# Altium PCB TicketMonitorSystem.PcbDoc
Units mil, origin at the board's own origin, x right, y up, seen from the top; angles counter-clockwise.
Board outline 6000 x 4000 mil, 2 copper layers (Top Layer, Bottom Layer); 47 components, 52 nets, 205 pads, 36 vias.
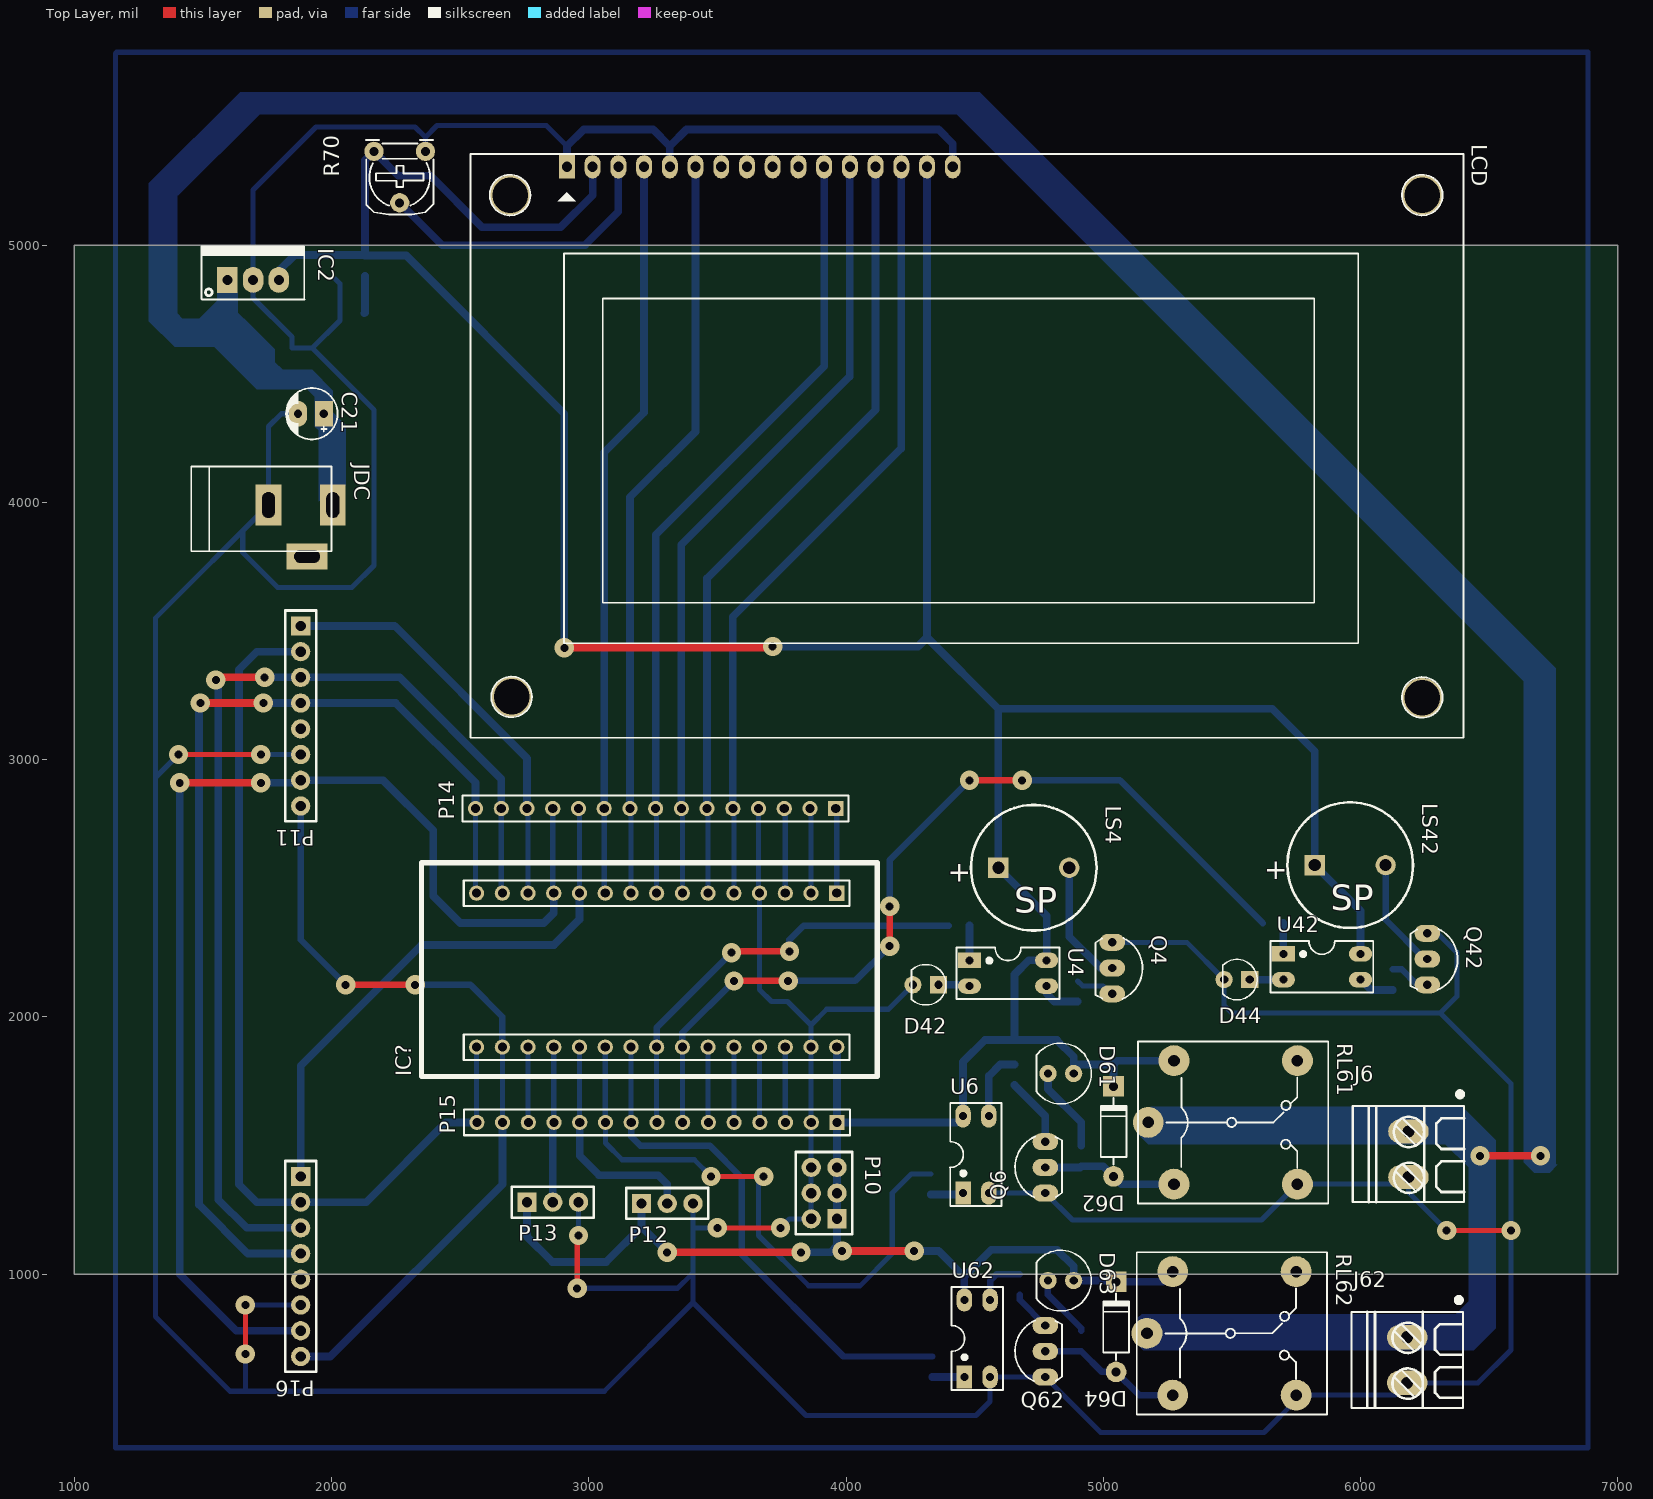
[diagram p0: Top Layer view]
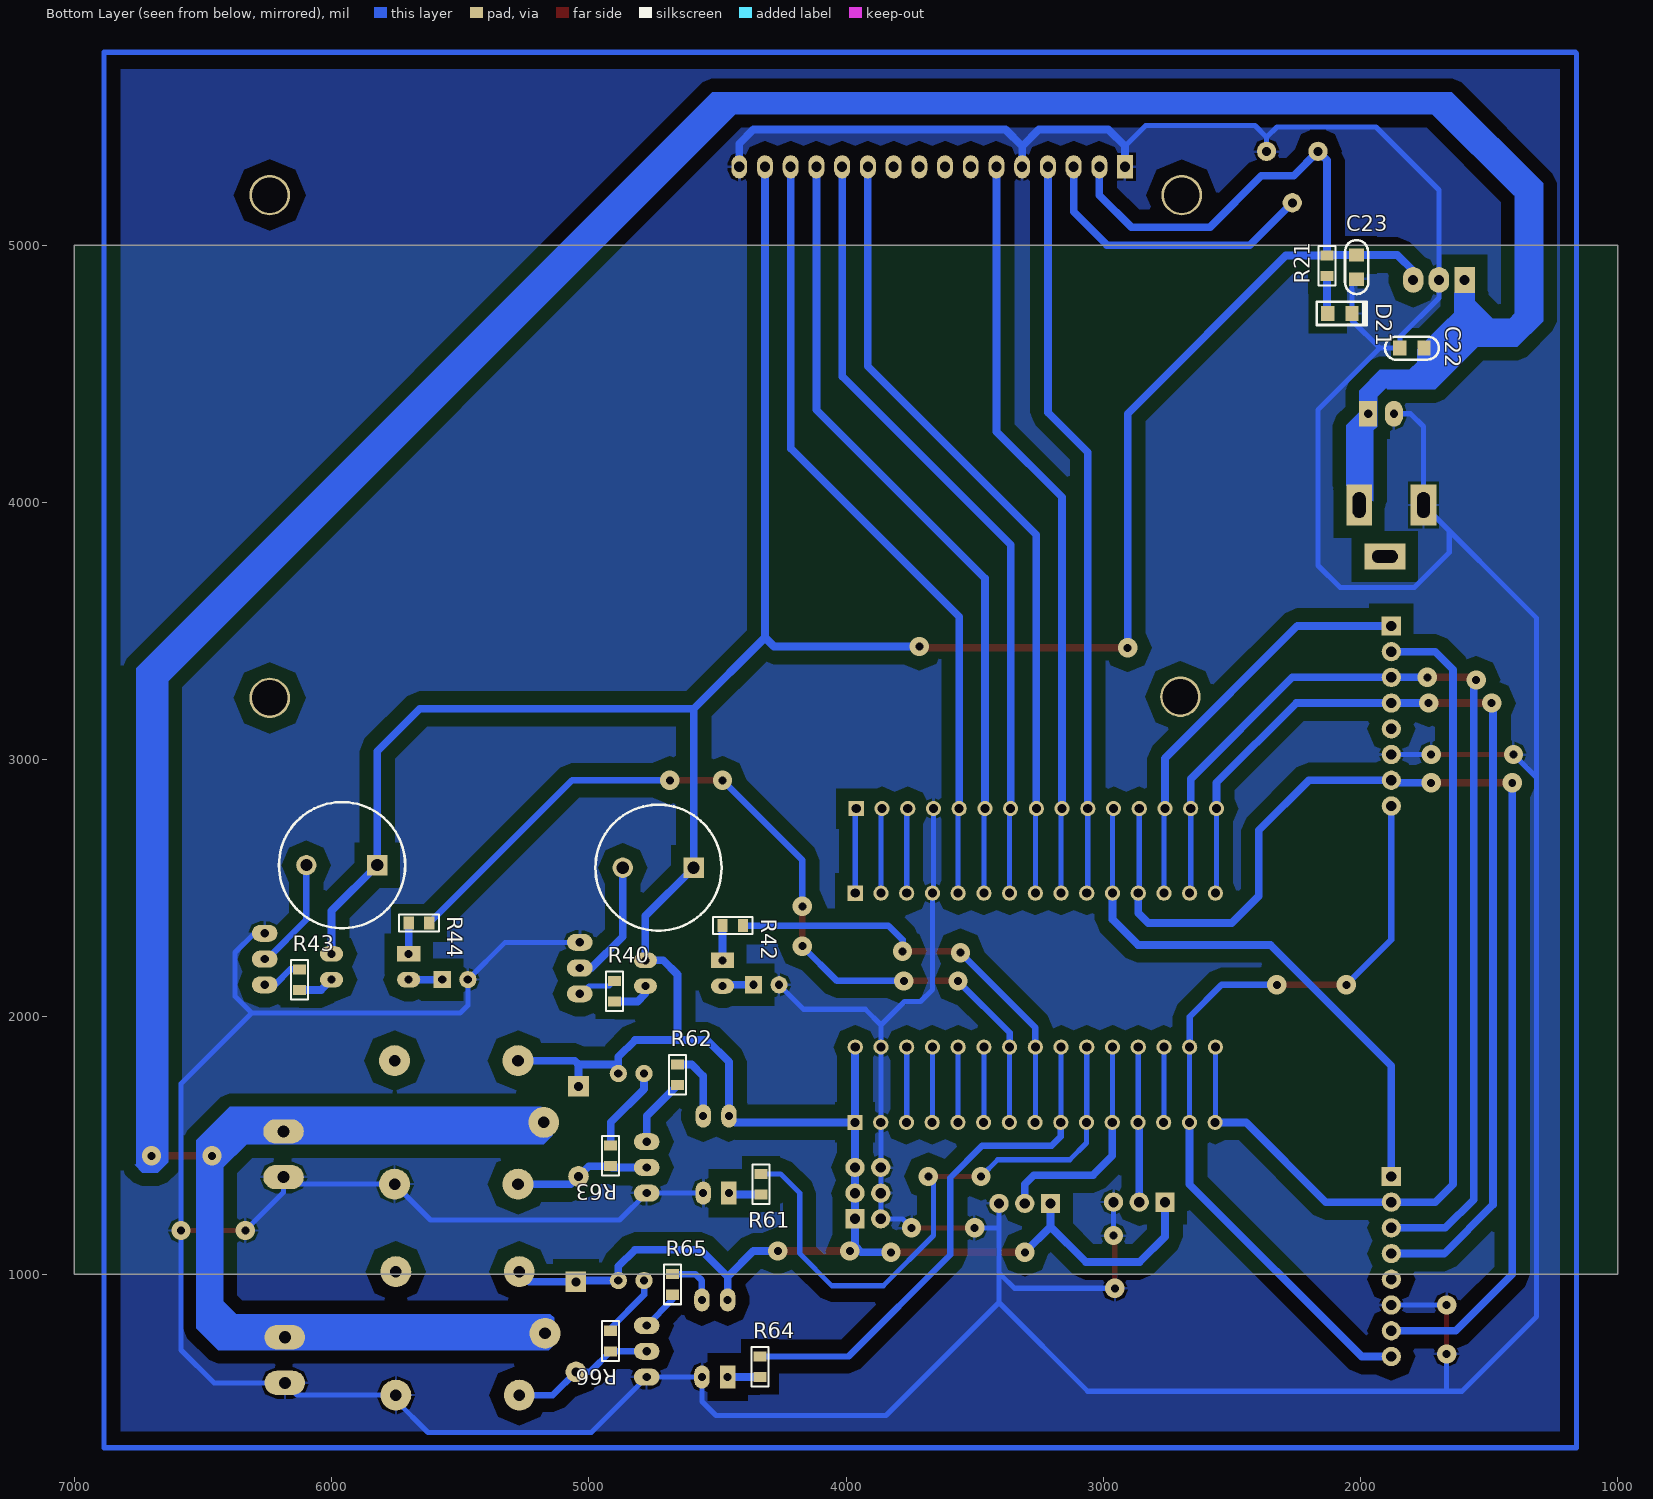
[diagram p1: Bottom Layer view, seen from below]

## Layer stack, top to bottom
Top Solder: solder mask 0.4, Solder Resist, Dk 3.5
Top Layer: signal copper 1.4
Dielectric 1: dielectric 12.6, FR-4, Dk 4.8
Bottom Layer: signal copper 1.4
Bottom Solder: solder mask 0.4, Solder Resist, Dk 3.5

## Board outline
1000,1000 7000,1000 7000,5000 1000,5000

## Design rules (kind name [scope] priority, off if disabled: settings)
Clearance [All] p1: gap=50
PolygonConnect [All] p1: connectstyle=Relief reliefconductorwidth=10 reliefentries=4 polygonreliefangle="90 Angle" airgapwidth=10
RoutingVias [All] p1: holewidth=28 width=50 viastyle="Through Hole" minholewidth=28 minwidth=50 maxholewidth=28 maxwidth=50
SolderMaskExpansion [All] p1: expansion=4
Width [All] p1: maxlimit=60 minlimit=15 preferedwidth=20
30 further rules are at their usual default settings.

## Components (designator, comment, footprint, x,y, rotation, side; value= is the part's Value field where it differs from the comment)
C21 "100uF/16V" CP1/2 1970,4345 r180 top
C22 "Cap Non-pol" C-NP-0805 1800,4600 r180 bottom
C23 "Cap Non-pol" C-NP-0805 2015,4915 r90 bottom
D21 "LED" "LED-0805 RED" 2080,4735 r180 bottom
D42 "LED" "LED-0 3mm GREEN" 4310,2125 r270 top
D44 "LED" "LED-0 3mm GREEN" 5520,2145 r270 top
D61 "LED" "LED-0 5mm RED" 4835,1780 r270 top
D62 "1N4007" D1A 5040,1380 r270 top
D63 "LED" "LED-0 5mm RED" 4835,975 r270 top
D64 "1N4007" D1A 5050,620 r270 top
IC2 "LM7805" QTO-220 1595,4865 r0 top
IC? "Arduino Nano" Nano 3275,2170 r180 top
J6 "CON.Domino2" "Domino 2M" 5970,1280 r0 top
J62 "CON.Domino2" "Domino 2M" 5965,480 r0 top
JDC "Jac DC" DC-IN 1880,3890 r0 top
LCD "LCD 20x4A" LCD20X4A 2915,5305 r0 top
LS4 "Speaker_1" SPEAKER 4730,2580 r0 top
LS42 "Speaker_1" SPEAKER 5960,2590 r0 top
P10 "Header 3x2" "Header 3x2" 3965,1215 r90 top
P11 "Header 8" "Header 8" 1880,3520 r270 top
P12 "Header 3" "Header 3" 3205,1275 r0 top
P13 "Header 3" "Header 3" 2760,1280 r0 top
P14 "Header 15" HDR1X15 3960,2810 r180 top
P15 "Header 15" HDR1X15 3965,1590 r180 top
P16 "Header 8" "Header 8" 1880,1380 r270 top
Q4 "C1815" QTO-92 5035,2190 r270 top
Q6 "C1815" QTO-92 4775,1415 r90 top
Q42 "C1815" QTO-92 6260,2225 r270 top
Q62 "C1815" QTO-92 4775,700 r90 top
R21 "RES_SMD_0805" "DIEN TRO 0805" 2130,4920 r90 bottom
R40 "RES_SMD_0805" "DIEN TRO 0805" 4900,2100 r90 bottom
R42 "RES_SMD_0805" "DIEN TRO 0805" 4440,2355 r180 bottom
R43 "RES_SMD_0805" "DIEN TRO 0805" 6125,2145 r90 bottom
R44 "RES_SMD_0805" "DIEN TRO 0805" 5660,2365 r180 bottom
R61 "RES_SMD_0805" "DIEN TRO 0805" 4330,1350 r90 bottom
R62 "RES_SMD_0805" "DIEN TRO 0805" 4655,1775 r90 bottom
R63 "RES_SMD_0805" "DIEN TRO 0805" 4915,1460 r270 bottom
R64 "RES_SMD_0805" "DIEN TRO 0805" 4335,640 r90 bottom
R65 "RES_SMD_0805" "DIEN TRO 0805" 4675,960 r90 bottom
R66 "RES_SMD_0805" "DIEN TRO 0805" 4915,740 r270 bottom
R70 "10K" VR 2365,5365 r180 top
RL61 "Relay 10A/12V" RL_SPDT_10A 5175,1590 r0 top
RL62 "Relay 10A/12V" RL_SPDT_10A 5170,770 r0 top
U4 "TLP521-1" DIP4/W0.3 4480,2220 r270 top
U6 "TLP521-1" DIP4/W0.3 4455,1315 r0 top
U42 "TLP521-1" DIP4/W0.3 5700,2245 r270 top
U62 "TLP521-1" DIP4/W0.3 4460,600 r0 top

## Footprints (in the part's own frame and the unit in brackets; to place one, negate y for a bottom-side part, rotate by r counter-clockwise, add the part's x,y. Pads: shape width x height; smd on the part's side, far side on the other; paste and mask are expansions set on the pad)
C-NP-0805 [mm] "Chip Capacitor; Non-polarized; Body 2.0 x 1.3 mm (LxW typ) [2012]"
  rect 1.3x1.5 smd: 1(-1.194,0) 2(1.194,0)
  silkscreen extent -2.67,-1.14 2.66,1.14, body extent -0.8,-0.43 0.8,0.43, height 0.79
CP1/2 [mil] "Tu hoa < 22uF/16>50V"
  rect 70x100 hole 32: 1(0,0)
  oval 70x100 hole 32: 2(100,0)
  silkscreen extent -53,-100 147,100, body extent -49,-99 149,99, height 287
D1A [mil] "Diode 1A, W 100mil, L 350mil"
  round 80 hole 35: 1(0,0)
  rect 80x80 hole 35: 2(-350,0)
  silkscreen extent -305,-50 -45,50, body extent -386,-33 34,36, height 84
DC-IN [mil] "Jac DC input"
  rect 100x160 hole 50 slot 100 at 90 deg: 1(125,100) 2(-125,100)
  rect 160x100 hole 50 slot 100 at 0 deg: 3(25,-100)
  silkscreen extent -425,-80 120,250, body extent -410,-105 134,269, height 434
"DIEN TRO 0805" [mil] "Chip Resistor; Body 2.0 x 1.3 mm (LxW typ)"
  rect 39.37x50 smd: 1(-40,0) 2(40,0)
  silkscreen extent -77,-33 77,33, body extent -39,-25 39,25, height 31
DIP4/W0.3 [mil] "4 PIN, W 300mil, Pin to pin 100mil"
  rect 60x90 hole 31: 1(0,0)
  oval 60x90 hole 31: 2(100,0) 3(100,300) 4(0,300)
  silkscreen extent -50,-50 150,350, body extent -59,-10 159,305, height 170
"Domino 2M" [mm]
  oval 4x2.4 hole 1.2: 1(5.5,6.975) 2(5.5,2.475)
  silkscreen extent 0,0 11,10.9, body extent 1.35,-0.22 8.85,9.78, height 10
HDR1X15 [mm] "Connector; Header; 15 Position"
  rect 1.5x1.5 hole 0.9: 1(0,0)
  round 1.5 hole 0.9: 2(2.54,0) 3(5.08,0) 4(7.62,0) 5(10.16,0) 6(12.7,0) 7(15.24,0) 8(17.78,0) 9(20.32,0) 10(22.86,0) 11(25.4,0) 12(27.94,0) 13(30.48,0) 14(33.02,0) 15(35.56,0)
  silkscreen extent -1.27,-1.27 36.83,1.27
"Header 3" [mil] "Connector; Header; 3 Position; Solder Pad 35mil"
  rect 75x75 hole 40: 1(0,0)
  round 75 hole 40: 2(100,0) 3(200,0)
  silkscreen extent -60,-60 260,60, body extent -50,-50 250,50, height 83
"Header 3x2" [mil] "Connector; Header; 6 Position; 2 Row; Solder Pad 35mil"
  rect 75x75 hole 40: 1(0,0)
  round 75 hole 40: 2(0,100) 3(100,0) 4(100,100) 5(200,0) 6(200,100)
  silkscreen extent -60,-60 260,160, body extent -50,-50 250,150, height 83
"Header 8" [mil] "Connector; Header; 8 Position; Solder Pad 35mil"
  rect 75x75 hole 40: 1(0,0)
  round 75 hole 40: 2(100,0) 3(200,0) 4(300,0) 5(400,0) 6(500,0) 7(600,0) 8(700,0)
  silkscreen extent -60,-60 760,60, body extent -50,-50 750,50, height 330
LCD20X4A [mil] "LCD dipslay 20x4, 16 pin"
  rect 62x90 hole 39: 1(0,0)
  oval 62x90 hole 39: 2(100,0) 3(200,0) 4(300,0) 5(400,0) 6(500,0) 7(600,0) 8(700,0) 9(800,0) 10(900,0) 11(1000,0) 12(1100,0) 13(1200,0) 14(1300,0) 15(1400,0) 16(1500,0)
  round 157.48 hole 137.8: "Hole 0"(-220,-110) "Hole 0"(-215,-2060) "Hole 0"(3325,-2065) "Hole 0"(3325,-110)
  silkscreen extent -375,-2220 3485,50, body extent -392,-2264 3466,98, height 417
"LED-0 3mm GREEN" [mil] "Typical LED; GREEN; RED; 2 Leads; Solder Pad 35mil"
  rect 67x67 hole 32: 1(0,50)
  round 67 hole 32: 2(0,-50)
  silkscreen extent -79,-56 79,79, body extent -64,-66 66,64, height 207
"LED-0 5mm RED" [mil] "Typical LED; RED; 2 Leads; Solder Pad 35mil"
  round 67 hole 32: 1(0,50) 2(0,-50)
  silkscreen extent -118,-96 118,118, body extent -118,-96 119,117, height 345
"LED-0805 RED" [mm] "Chip LED; RED; Body 2.0 x 1.3 mm (LxW typ) [2012]"
  rect 1.3x1.5 smd: 1(-1.204,0) 2(1.204,0)
  silkscreen extent -2.29,-1.14 2.67,1.14, body extent -1.01,-0.63 1.01,0.62, height 1.1
Nano [mm]
  rect 1.5x1.5 hole 0.9: 1(-17.5,-7.9)
  round 1.5 hole 0.9: 2(-14.96,-7.9) 3(-12.42,-7.9) 4(-9.88,-7.9) 5(-7.34,-7.9) 6(-4.8,-7.9) 7(-2.26,-7.9) 8(0.28,-7.9) 9(2.82,-7.9) 10(5.36,-7.9) 11(7.9,-7.9) 12(10.44,-7.9) 13(12.98,-7.9) 14(15.52,-7.9) 15(18.06,-7.9) 16(18.06,7.3) 17(15.52,7.3) 18(12.98,7.3) 19(10.44,7.3) 20(7.9,7.3) 21(5.36,7.3) 22(2.82,7.3) 23(0.28,7.3) 24(-2.26,7.3) 25(-4.8,7.3) 26(-7.34,7.3) 27(-9.88,7.3) 28(-12.42,7.3) 29(-14.96,7.3) 30(-17.5,7.3)
  silkscreen extent -21.5,-10.9 23.5,10.2
QTO-92 [mil] "TO-92"
  oval 66x100 hole 32: 1(-100,0) 2(0,0) 3(100,0)
  silkscreen extent -117,-65 120,118, body extent -109,-66 109,95, height 245
QTO-220 [mil] "TO-220 - 1-2-3"
  rect 80x100 hole 39: 1(0,0)
  oval 80x100 hole 39: 2(100,0) 3(200,0)
  silkscreen extent -100,-76 300,130, body extent -119,-64 322,121, height 755
RL_SPDT_10A [mil] "Relay SPDT, 5 pin, 10A,W 650mil, L 800mil, H 800mil"
  round 120 hole 45: 1(0,0) 2(580,240) 3(580,-240) 4(100,-240) 5(100,240)
  silkscreen extent -40,-315 700,315, body extent -46,-304 706,306, height 602
SPEAKER [mm] "Speaker footprint"
  rect 2x2 hole 1.2: 1(-3.5,0)
  round 2 hole 1.2: 2(3.5,0)
  silkscreen extent -6.2,-6.2 6.2,6.2, body extent -6.2,-6.2 6.2,6.2, height 10.02
VR [mil] "Resistor Variable"
  round 75 hole 35: 1(0,0) 2(100,200) 3(200,0)
  silkscreen extent -31,-44 231,246, body extent -87,-30 307,372, height 165

## Part data
C21: library part CP1, "Cap P  0,1uF < 22uF , 16 - 50V"
C22 C23: "Non-polarized Capacitor"
D21 D42 D44 D61 D63: "Typical LED"
D62 D64: library part D1A, "Diode 1A"
IC2: library part LM78xx, "On ap +, from + 5 to + 24VDC"
J6 J62: "2 pins Domino Header"
JDC: library part DCIN, "Jac DC input"
LCD: library part LCD20x4A, "LCD dipslay 20 char, 4 line"
LS4 LS42: "Loudspeaker"
P10: "Header, 6-Pin, 2-Row"
P11 P16: "Header, 8-Pin"
P12 P13: "Header, 3-Pin"
P14 P15: "Header, 15-Pin"
Q4 Q6 Q42 Q62: "NPN 600mW, ECB"
R21 R40 R42 R43 R44 R61 R62 R63 R64 R65 R66: "RES_0805"
R70: library part VR, "Var Resistor"
RL61 RL62: library part "Relay 1", "Relay SPDT,10A - 12VDC 5 Pin"
U4 U6 U42 U62: "Single Opto"

## Via types
v1: diameter 75, hole 31, Top Layer to Bottom Layer, 36 vias

## Nets (pads, with @x,y where several pads share a name; then routed paths per layer and width w, separated by ;. In a path a pad name is that pad's centre, name@x,y a point inside that pad or via, vN(x,y) a via of type N, cw(c..) or ccw(c..) an arc to the next point about the centre after c; other vN are vias at no path point)
3V3: IC?.17 P11.8 P15.14 P16.8 | length 3141.8
  Top Layer w25: v1(2055,2125) v1(2325,2125)
  Bottom Layer w20: IC?.17 2663.98,1591.02 P15.14
  Bottom Layer w25: P11.8 1880,2300 v1(2055,2125) ; v1(2325,2125) 2540,2125 2663.98,2001.02 IC?.17
  Bottom Layer w30: P16.8 1995,680 2665,1350 P15.14
5V: C23.2 D61.1 D62.2 D63.1 D64.2 IC2.3 IC?.30 LCD.2 LCD.15 LS4.1 LS42.1 P10.1 P10.3 P10.5 P12.1 P13.1 P15.1 R21.2 R70.3 RL61.5 RL62.5 U4.4 U6.4 U42.4 U62.4 | length 16852.4
  Top Layer w30: v1(2905,3435) 3710,3435 v1(3715,3440) ; v1(3305,1085) v1(3825,1085) ; v1(3985,1090) v1(4265,1090)
  Bottom Layer w20: IC?.30@3963.98,1881.57 IC?.30
  Bottom Layer w30: IC2.3 1795,4900 1857,4962 C23.2 2128,4962 R21.2 ; P13.1 2760,1145 2857.5,1047.5 3067.5,1047.5 3205,1185 ; v1(2905,3435) 2905,4345 2290,4960 R21.2 ; LCD.2 3015,5195 2890,5070 2585,5070 2385,5270 2260,5270 R70.3 2130,5330 R21.2 ; P12.1 3205,1185 ; v1(3305,1085) 3205,1185 ; v1(3715,3440) 4280,3440 4315,3475 ; v1(3825,1085) 3940,1085 3965,1110 P10.1 P10.3 P10.5 P15.1 ; IC?.30@3965,1881.57 P15.1 ; v1(4265,1090) 4360,1090 4460,990 ; LCD.15 4315,3475 ; U62.4 4460,990 ; D62.2 5040,1815 ; RL62.5 5230,970 D64.2 5045,975 D63.1 4885,1030 4820,1095 4565,1095 4460,990 ; RL61.5 5055,1830 5040,1815 ; U42.4 6000,2412.2 LS42.1 5822.2,3032.8 5657.2,3197.8 4592.2,3197.8 ; P15.1 4430,1590 U6.4 4455,1825 4540,1910 4655,1910 ; 4315,3475 4592.2,3197.8 ; 4592.2,3197.8 LS4.1 4780,2392.2 U4.4 4710,2220 4655,2165 4655,1910 ; 4655,1910 4820,1910 4885,1845 D61.1 4885,1815 5040,1815
9V: C21.1 C22.2 IC2.1 J6.1 J62.1 JDC.1 RL61.1 RL62.1 | length 13724.5
  Top Layer w30: v1(6465,1460) v1(6700,1460)
  Bottom Layer w30: IC2.1 1595,4758 ; JDC.1 2005,4310 C21.1 1970,4430 1915,4485 1790,4485 1753,4522 C22.2 1595,4758 ; RL62.1 6166.14,770 J62.1 6374.61,754.61 6470,850 6470,1455 v1(6465,1460) 6370.39,1554.61 J6.1 5210.39,1554.61 RL61.1 ; v1(6700,1460) 6700,3325 4480,5545 1685,5545 1360,5220 1360,4710 1415,4655 1492,4655 1595,4758
BUZZER_1: IC?.23 P15.8 R42.2 | length 1694.4
  Top Layer w25: v1(3555,2250) 3560,2255 v1(3780,2255)
  Bottom Layer w20: P15.8@3263.98,1591.02 IC?.23
  Bottom Layer w25: IC?.23 3263.98,1958.98 v1(3555,2250) ; v1(3780,2255) 3780,2300 3835,2355 R42.2
BUZZER_2: IC?.24 P15.7 R44.2 | length 3436.5
  Top Layer w25: v1(3565,2140) v1(3775,2140) ; v1(4170,2275) v1(4170,2430) ; v1(4480,2920) v1(4685,2920)
  Bottom Layer w20: P15.7@3363.98,1591.02 IC?.24
  Bottom Layer w25: IC?.24 3363.98,1938.98 v1(3565,2140) ; v1(3775,2140) 4035,2140 v1(4170,2275) ; v1(4170,2430) 4170,2610 v1(4480,2920) ; v1(4685,2920) 5065,2920 R44.2
D4_LCD: IC?.8 LCD.11 P14.8 | length 3096.9
  Bottom Layer w20: P14.8 3263.98,2806.02 IC?.8
  Bottom Layer w30: P14.8 3260,3875 3915,4530 LCD.11
D5_LCD: IC?.7 LCD.12 P14.7 | length 3096.9
  Bottom Layer w20: P14.7 3363.98,2806.02 IC?.7
  Bottom Layer w30: P14.7 3360,3835 4015,4490 LCD.12
D6_LCD: IC?.6 LCD.13 P14.6 | length 3096.9
  Bottom Layer w20: P14.6 3463.98,2806.02 IC?.6
  Bottom Layer w30: P14.6 3460,3705 4115,4360 LCD.13
D7_LCD: IC?.5 LCD.14 P14.5 | length 3096.9
  Bottom Layer w20: P14.5 3563.98,2806.02 IC?.5
  Bottom Layer w30: P14.5 3560,3555 4215,4210 LCD.14
EN_LCD: IC?.9 LCD.6 P14.9 | length 2931.2
  Bottom Layer w20: P14.9 3163.98,2806.02 IC?.9
  Bottom Layer w30: P14.9 3160,4020 3415,4275 LCD.6
GND: C21.2 C22.1 C23.1 D21.2 D42.2 D44.2 IC2.2 IC?.4 IC?.29 J6.2 J62.2 JDC.2 LCD.1 LCD.5 LCD.16 P10.2 P10.4 P10.6 P11.6 P12.3 P13.3 P14.4 P15.2 P16.6 Q4.1 Q6.1 Q42.1 Q62.1 R70.1 RL61.3 RL62.3 U6.2 U62.2 | length 26549.6
  Top Layer w20: v1(1405,3020) v1(1725,3020) ; v1(1665,690) v1(1665,880) ; v1(2955,945) 2955,1170 2960,1165 v1(2960,1150) ; v1(3500,1180) v1(3745,1180) ; v1(6335,1170) v1(6585,1170)
  Bottom Layer w20: 1320,2935 v1(1405,3020) ; v1(1665,690) 1665,545 ; v1(1665,880) P16.6 ; v1(1725,3020) P11.6 ; C21.2 1805,4345 1755,4295 JDC.2 ; C23.1 2032.6,4850.4 D21.2 2032.6,4707.6 1925,4600 ; R70.1 2365,5420 ; 2915,5385 2835,5465 2410,5465 2365,5420 ; v1(2955,945) 3345,945 3400,1000 ; v1(2960,1150) P13.3 ; P12.3 3405,890 ; 3410,1180 v1(3500,1180) ; IC?.4@3660,2485 P14.4 ; IC?.4 3663.98,2106.02 3710,2060 3772.95,2060 3863.98,1968.98 ; v1(3745,1180) 3780,1215 P10.2 3863.98,1216.02 IC?.29 3863.98,1968.98 ; D42.2 4165,2030 3925,2030 3863.98,1968.98 ; U6.2 Q6.1 4880,1210 5615,1210 RL61.3 6159.09,1350 J6.2 6186.54,1318.46 v1(6335,1170) ; Q4.1 5325,2290 D44.2 5470,2045 5500,2015 6310,2015 ; Q42.1 6300,2325 6375,2250 6375,2080 6310,2015 ; 1665,545 3060,545 3405,890 ; 1665,545 1605,545 1315,835 1315,3550 JDC.2 ; JDC.2 1655,3890 1655,3805 1790,3670 2080,3670 2165,3755 2165,4360 1925,4600 ; 1925,4600 C22.1 1847,4643 1695,4795 IC2.2 1695,5215 1940,5460 2325,5460 2365,5420 ; 3405,890 3845,450 4505,450 4560,505 U62.2 Q62.1 4990,385 5625,385 5750,510 RL62.3 6134.09,530 J62.2 6457.44,577.44 6585,705 v1(6585,1170) 6585,1740 6310,2015
  Bottom Layer w30: LCD.1 2915,5385 2980,5450 3250,5450 3315,5385 ; LCD.5 3315,5385 ; LCD.16 4415,5395 4360,5450 3380,5450 3315,5385
INFRARED_RFID_1: IC?.19 P13.2 P15.12 | length 598
  Bottom Layer w20: IC?.19 2863.98,1591.02 P15.12
  Bottom Layer w30: P13.2 P15.12@2860,1585
INFRARED_RFID_2: IC?.20 P12.2 P15.11 | length 883.6
  Bottom Layer w20: IC?.20 2963.98,1591.02 P15.11
  Bottom Layer w30: P15.11 2965,1460 3040,1385 3270,1385 3305,1350 P12.2
MISO_RFID: IC?.15 P11.4 P14.15 P16.4 | length 4049.2
  Top Layer w30: v1(1490,3220) v1(1735,3220)
  Bottom Layer w20: IC?.15@2560,2485 P14.15
  Bottom Layer w30: v1(1490,3220) 1485,3215 1485,1270 1675,1080 P16.4 ; v1(1735,3220) P11.4 2250,3220 2560,2910 P14.15
MOSI_RFID: IC?.14 P11.3 P14.14 P16.3 | length 4112.5
  Top Layer w30: v1@1540,3310 v1(1550,3310) ; v1@1555,3310 1565,3320 v1(1740,3320)
  Bottom Layer w20: IC?.14@2660,2485 P14.14
  Bottom Layer w30: v1(1550,3310) 1560,3300 1560,1290 1670,1180 P16.3 ; v1(1740,3320) P11.3 2265,3320 2660,2925 P14.14
NetD21_1: D21.1 R21.1 | length 146.1
  Bottom Layer w30: D21.1 2130,4737.6 R21.1
NetD42_1: D42.1 U4.2 | length 122.1
  Bottom Layer w30: D42.1 4475,2125 U4.2
NetD44_1: D44.1 U42.2 | length 130
  Bottom Layer w30: D44.1 U42.2
NetD61_2: D61.2 R63.1 | length 333.8
  Bottom Layer w30: D61.2 4785,1720 4915,1590 R63.1
NetD62_1: D62.1 Q6.2 R63.2 RL61.4 | length 531.1
  Bottom Layer w30: Q6.2 4910,1415 R63.2 5000,1420 D62.1 5070,1350 RL61.4
NetD63_2: D63.2 R66.1 | length 248.8
  Bottom Layer w25: D63.2 4785,920 4915,790 R66.1
NetD64_1: D64.1 Q62.2 R66.2 RL62.4 | length 565.4
  Bottom Layer w25: Q62.2 R66.2 4995,620 D64.1 5140,530 RL62.4
NetIC?_1: IC?.1 P14.1 | length 330.6
  Bottom Layer w20: P14.1 3963.98,2806.02 IC?.1
NetIC?_2: IC?.2 P14.2 | length 330.6
  Bottom Layer w20: P14.2 3863.98,2806.02 IC?.2
NetIC?_3: IC?.3 P14.3 | length 330.6
  Bottom Layer w20: P14.3 3763.98,2806.02 IC?.3
NetIC?_18: IC?.18 P15.13 | length 293
  Bottom Layer w20: IC?.18 2763.98,1591.02 P15.13
NetIC?_25: IC?.25 P15.6 | length 293
  Bottom Layer w20: IC?.25 3463.98,1591.02 P15.6
NetIC?_26: IC?.26 P15.5 | length 293
  Bottom Layer w20: IC?.26 3563.98,1591.02 P15.5
NetIC?_27: IC?.27 P15.4 | length 293
  Bottom Layer w20: IC?.27 3663.98,1591.02 P15.4
NetIC?_28: IC?.28 P15.3 | length 293
  Bottom Layer w20: IC?.28 3763.98,1591.02 P15.3
NetLCD_3: LCD.3 R70.2 | length 1147.2
  Bottom Layer w30: R70.2 2430,5000 2985,5000 3115,5130 LCD.3
NetLS4_2: LS4.2 Q4.2 | length 485.6
  Bottom Layer w30: LS4.2 4867.8,2312.2 4990,2190 Q4.2
NetLS42_2: LS42.2 Q42.2 | length 437.8
  Bottom Layer w25: LS42.2 6097.8,2377.57 6250.37,2225 Q42.2
NetQ4_3: Q4.3 R40.2 | length 155.7
  Bottom Layer w20: R40.2 4920,2120 4998.9,2120 5028.9,2090 Q4.3
NetQ6_3: Q6.3 R62.1 | length 269.7
  Bottom Layer w30: R62.1 4775,1615 Q6.3
NetQ42_3: Q42.3 R43.2 | length 159.9
  Bottom Layer w25: R43.2 6160,2185 6220,2125 Q42.3
NetQ62_3: Q62.3 R65.1 | length 161.4
  Bottom Layer w25: R65.1 4675,900 Q62.3
NetR40_1: R40.1 U4.3 | length 162.4
  Bottom Layer w30: U4.3 4780,2090 4810,2060 R40.1
NetR42_1: R42.1 U4.1 | length 135
  Bottom Layer w30: U4.1 R42.1
NetR43_1: R43.1 U42.3 | length 141.6
  Bottom Layer w30: U42.3 6040,2105 R43.1
NetR44_1: R44.1 U42.1 | length 120
  Bottom Layer w30: U42.1 R44.1
NetR61_1: R61.1 U6.1 | length 127.1
  Bottom Layer w30: R61.1 4450,1310 U6.1
NetR62_2: R62.2 U6.3 | length 273.6
  Bottom Layer w30: U6.3 4555,1770 4600,1815 R62.2
NetR64_1: R64.1 U62.1 | length 125
  Bottom Layer w30: R64.1 U62.1
NetR65_2: R65.2 U62.3 | length 200.4
  Bottom Layer w25: U62.3 4560,975 4585,1000 R65.2
RELAY_1: IC?.21 P15.10 R61.2 | length 2348.8
  Top Layer w20: v1(3475,1380) v1(3680,1380)
  Bottom Layer w20: IC?.21 3063.98,1591.02 P15.10 3065,1510 3130,1445 3410,1445 v1(3475,1380) ; v1(3680,1380) 3660,1360 3660,1150 3855,955 4055,955 4180,1080 4180,1315 4255,1390 R61.2
RELAY_2: IC?.22 P15.9 R64.2 | length 2047.9
  Bottom Layer w20: IC?.22 3163.98,1591.02 P15.9
  Bottom Layer w25: P15.9 3165,1535 3200,1500 3470,1500 3595,1375 3595,1075 3990,680 R64.2
RS_LCD: IC?.10 LCD.4 P14.10 | length 2884.2
  Bottom Layer w20: IC?.10@3060,2485 P14.10
  Bottom Layer w30: P14.10 3060,4195 3215,4350 LCD.4
RST_RFID: IC?.12 P11.7 P14.12 P16.7 | length 4726.7
  Top Layer w30: v1(1410,2910) v1(1725,2910)
  Bottom Layer w20: IC?.12@2860,2485 P14.12
  Bottom Layer w30: v1(1410,2910) 1410,1000 1630,780 P16.7 ; v1(1725,2910) 1870,2910 P11.7 2200,2920 2395,2725 2395,2470 2500,2365 2825,2365 2863.98,2403.98 IC?.12
SCK_RFID: IC?.16 P11.2 P15.15 P16.2 | length 3644.4
  Bottom Layer w20: IC?.16 2563.98,1591.02 P15.15
  Bottom Layer w30: P11.2 1710,3420 1640,3350 1640,1350 1710,1280 P16.2 2135,1280 2445,1590 P15.15
SS_RFID_1: IC?.13 P11.1 P14.13 | length 1613.3
  Bottom Layer w20: IC?.13 P14.13@2763.98,2806.02
  Bottom Layer w30: P11.1 2245,3520 2760,3005 P14.13
SS_RFID_2: IC?.11 P14.11 P16.1 | length 2176.7
  Bottom Layer w20: IC?.11 P14.11@2963.98,2806.02
  Bottom Layer w30: P16.1 1880,1810 2350,2280 2865,2280 2963.98,2378.98 IC?.11
pads on no net: "LCD.Hole 0" JDC.3 LCD.7 LCD.8 LCD.9 LCD.10 P11.5 P16.5 RL61.2 RL62.2
copper on no net: | length 22297.1
  Bottom Layer w20: 1160,325 6885,325 6885,5750 1165,5750 1160,5745 1160,430 1160,325

## Polygon pours and split planes (outlines as drawn)
GND on Bottom Layer "G2" (solid, remove dead copper, pour order 2): 1195.57,5714.43 1195.57,354.43 6860.57,354.43 6855.57,359.43 6855.57,5714.43

## Other copper
Bottom Layer:
  region net 9V: 5185,1650 6395,1650 6525,1520 6525,790 6440,705 5155,705 5135,725 5135,830 5150,845 6370,845 6420,895 6420,1415 6330,1505 5175,1505 5140,1540
  region net 9V: 1950,4005 1950,4280 1935,4295 1935,4410 1900,4445 1895,4440 1710,4440 1545,4605 1655,4715 1660,4715 1780,4595 1780,4545 1810,4515 1925,4515 2005,4435 2005,4350 2055,4300 2055,4065
  region net 9V: 1555,4815 1555,4785 1485,4715 1420,4715 1400,4735 1400,5195 1405,5195 1720,5510 4430,5510 6635,3305 6635,1435 6675,1395 6735,1395 6765,1425 6760,1430 6760,3355 4520,5595 1645,5595 1290,5240 1290,4705 1390,4605 1545,4605 1635,4695 1635,4815

## Text inside footprints (layer, text, board x,y; h text height)
LS4: Top Overlay "+" at 4395,2525 h80; Top Overlay "SP" at 4655,2405 h100
LS42: Top Overlay "SP" at 5885,2415 h100; Top Overlay "+" at 5625,2535 h80